# EAGLE board Ex I2C Extension (EAGLE 7.6.0)

Size 27 x 28.5 mm. Coordinates in mm from the lower left corner, seen from the top.
Outline: 0,0 27,0 27,28.5 0,28.5 0,0
Copper layers (1*16): Top 0.035mm / dielectric 1.5mm / Bottom 0.035mm
Design rules "default": minimum track width 10mil, minimum drill 24mil, track to track 8mil, track to pad 8mil, pad to pad 8mil, via to via 8mil, smd to smd 8mil, copper to edge 40mil, drill to drill 8mil, minimum pad ring 10mil, minimum via ring 8mil, stop-mask expansion 4mil, vias tented up to drill 0mil, thermal gap 10mil

## Footprints (pad centres in the part's own frame; a part is rotated, then mirrored left to right if it is on the bottom)
1X04 = drill 1.016 long: 1 -3.81,0; 2 -1.27,0; 3 1.27,0; 4 3.81,0
1X10-BIG = drill 1.016 pad 1.778 octagon: 1 -11.43,0; 2 -8.89,0; 3 -6.35,0; 4 -3.81,0; 5 -1.27,0; 6 1.27,0; 7 3.81,0; 8 6.35,0; 9 8.89,0; 10 11.43,0
R0805 = smd 1.1 x 1.4: 1 -1,0; 2 1,0

## Placement (x,y rotation side)
I2C_1  [1X04]  25,13 270 top
I2C_2  [1X04]  2,13 270 top
NUSBIO_IN_0  PINHD-1X10  [1X10-BIG]  13.5,1.5 180 top
NUSBIO_OUT_0  PINHD-1X10  [1X10-BIG]  13.5,27 180 top
R_SCL  [R0805]  3,22.5 0 top
R_SDA  [R0805]  19,22.5 0 top

## Library data of the parts
I2C_1 I2C_2 = pinhead
NUSBIO_IN_0 NUSBIO_OUT_0 R_SCL R_SDA = adafruit

## Nets
GND: I2C_1.1 I2C_2.2 NUSBIO_IN_0.10 NUSBIO_OUT_0.10
GPIO0_SCL: I2C_1.3 I2C_2.3 NUSBIO_IN_0.1 NUSBIO_OUT_0.1 R_SCL.2
GPIO1_SDA: I2C_1.4 I2C_2.4 NUSBIO_IN_0.2 NUSBIO_OUT_0.2 R_SDA.2
GPIO2: NUSBIO_IN_0.3 NUSBIO_OUT_0.3
GPIO3: NUSBIO_IN_0.4 NUSBIO_OUT_0.4
GPIO4: NUSBIO_IN_0.5 NUSBIO_OUT_0.5
GPIO5: NUSBIO_IN_0.6 NUSBIO_OUT_0.6
GPIO6: NUSBIO_IN_0.7 NUSBIO_OUT_0.7
GPIO7: NUSBIO_IN_0.8 NUSBIO_OUT_0.8
VCC: I2C_1.2 I2C_2.1 NUSBIO_IN_0.9 NUSBIO_OUT_0.9 R_SCL.1 R_SDA.1

## Tracks (layer width: path | path; a pad name or v marks a point on that pad's centre or on a via)
GND  (3 unrouted)
GPIO0_SCL  (4 unrouted)
GPIO1_SDA  (4 unrouted)
GPIO2  (1 unrouted)
GPIO3  (1 unrouted)
GPIO4  (1 unrouted)
GPIO5  (1 unrouted)
GPIO6  (1 unrouted)
GPIO7  (1 unrouted)
VCC  (5 unrouted)

## Text on the board
tNames: GND | VCC | 7 | 6 | 5 | 4 | 3 | 2 | 1 | 0 | VCC | VCC | GND | GND | GND | Nusbio / I2C Extension | Nusbio / I2C Extension | VCC | VCC | GND | GPIO0_SCL | GPIO0_SCL | GPIO1_SDA | GPIO1_SDA | GND | VCC | 7 | 6 | 5 | 4 | 3 | 2 | 1 | 0
bNames: PCBv1 FT-2016.8 | MadeInTheUSB.net